# EAGLE board pdb (EAGLE 9.1.3)
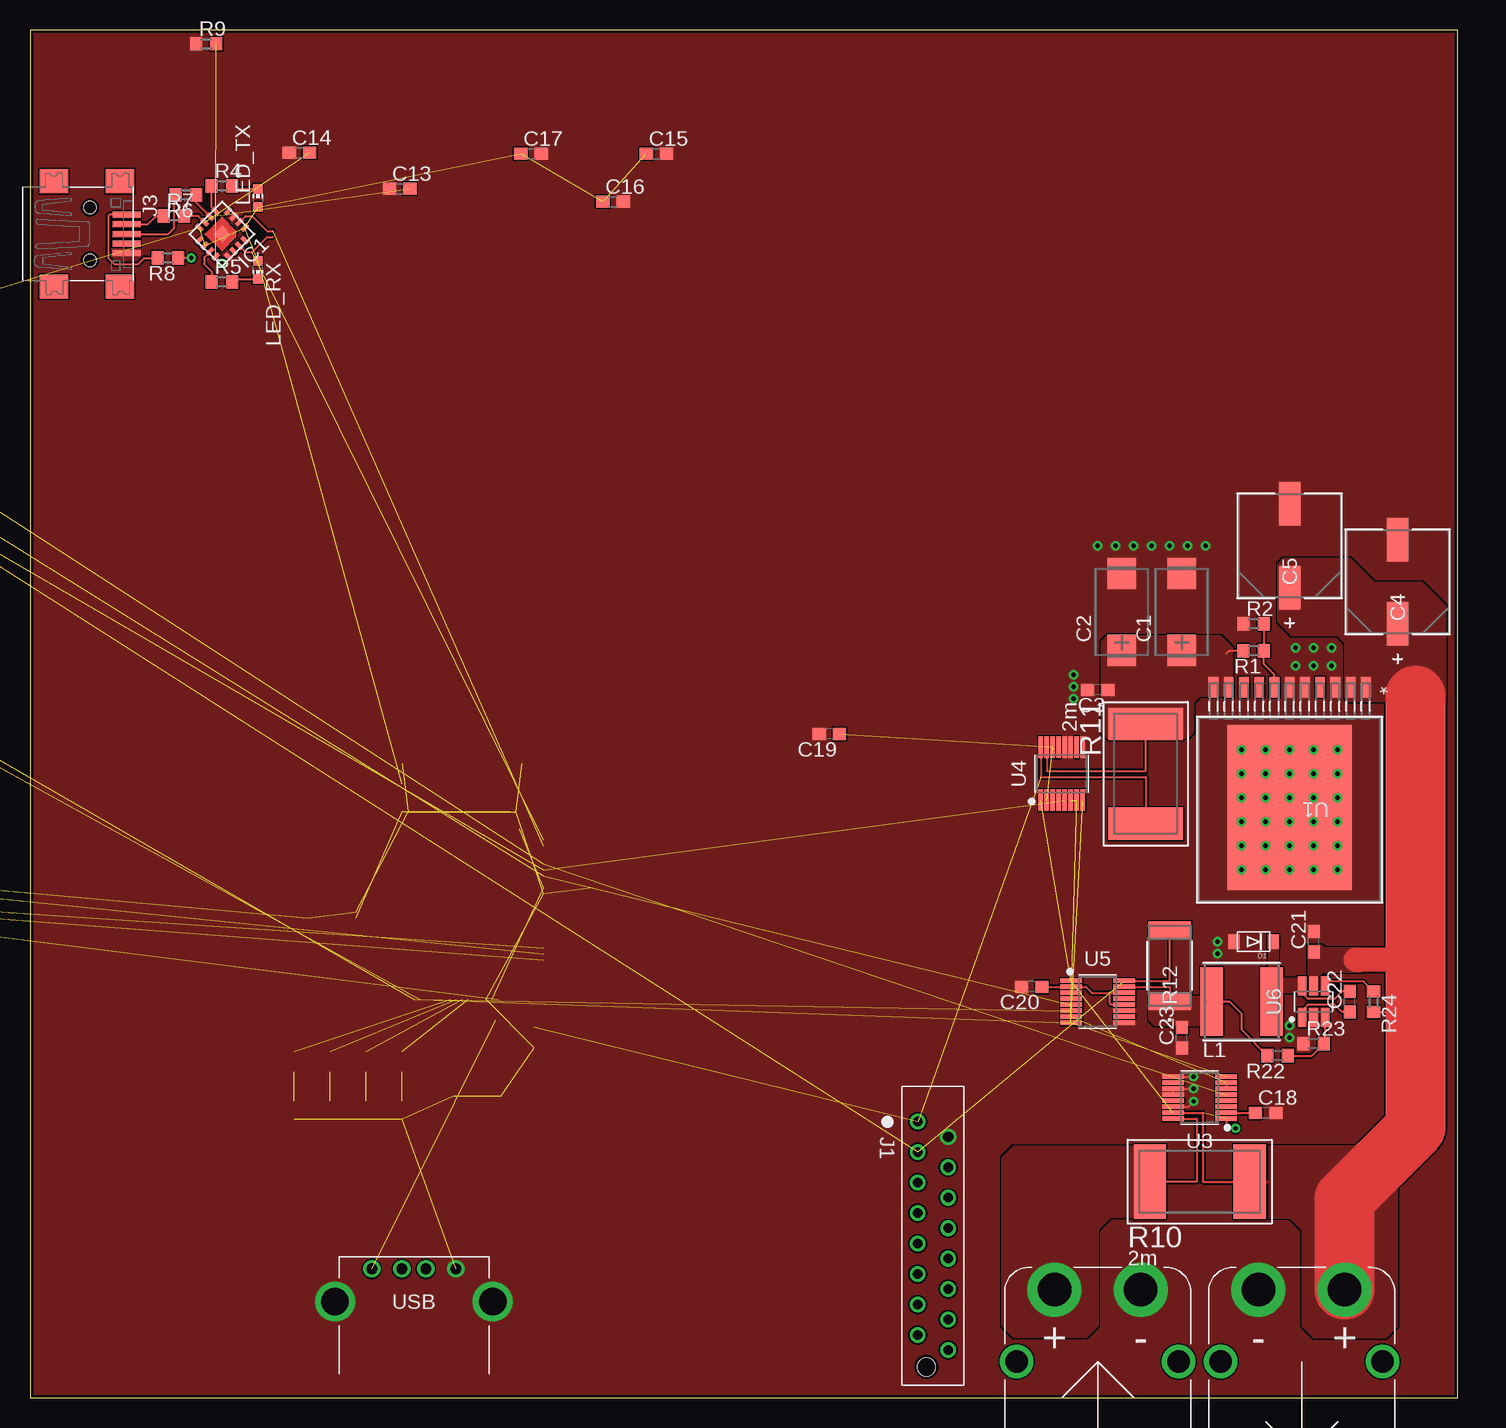
[diagram p0: board, top side]
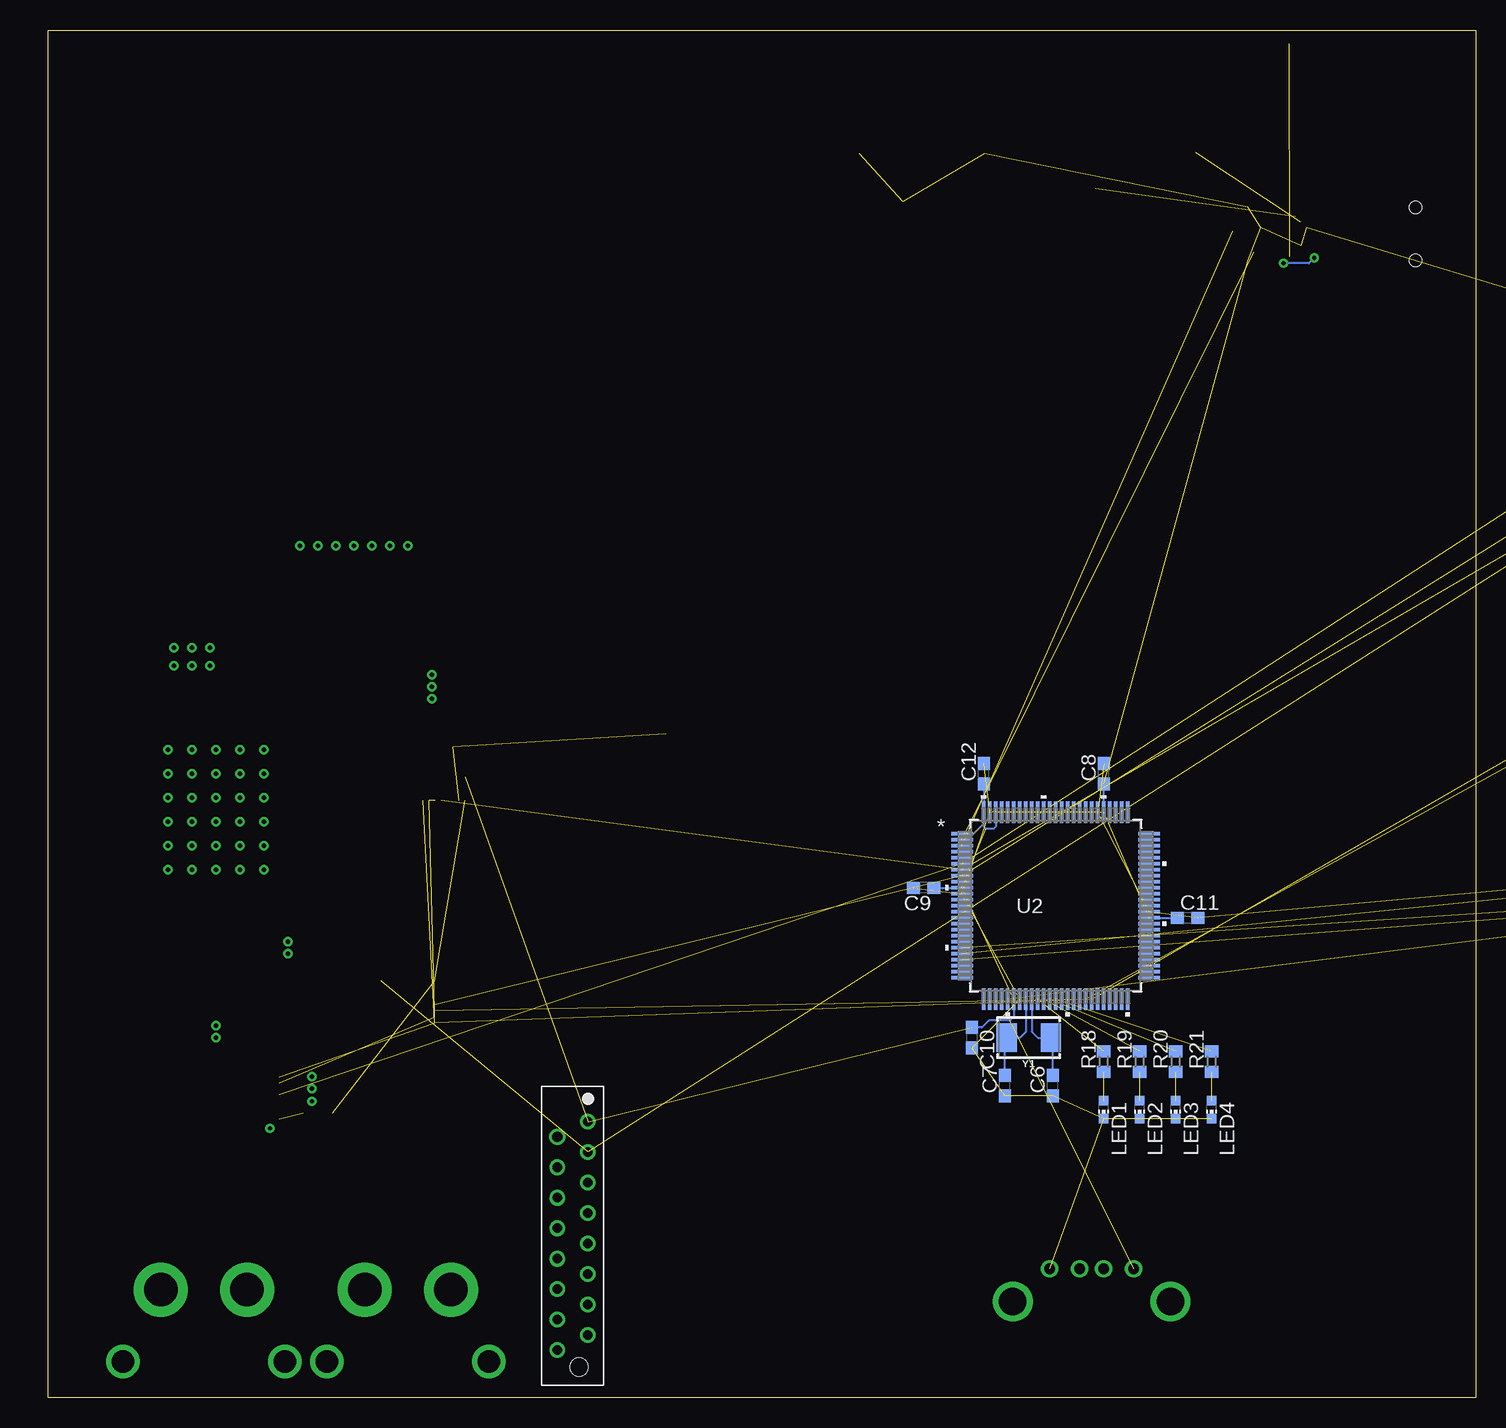
[diagram p1: board, bottom side, seen from below]

Size 119 x 114 mm. Coordinates in mm from the lower left corner, seen from the top.
Outline: 0,0 119,0 119,114 0,114 0,0
Copper layers (1*16): Top 0.035mm / dielectric 1.53mm / Bottom 0.035mm
Design rules "default *": minimum track width 6mil, minimum drill 0.35mm, track to track 6mil, track to pad 6mil, pad to pad 6mil, via to via 6mil, smd to smd 6mil, copper to edge 10mil, drill to drill 6mil, minimum pad ring 10mil, minimum via ring 8mil, stop-mask expansion 4mil, vias tented up to drill 0mil, thermal gap 10mil

## Footprints (pad centres in the part's own frame; a part is rotated, then mirrored left to right if it is on the bottom)
XT60PWMALE = drill 1.85: NC1 -6.75,0; NC2 6.75,0 | drill 2.8 pad 4.5: NEG -3.6,-6; POS 3.6,-6
CT7343 = smd 2.6 x 2.4: + -3.2,0; - 3.2,0
C0603 = smd 1.1 x 1: 1 -0.85,0; 2 0.85,0
PCAP_SVP_E7 = smd 3.607 x 1.829: 1 -3.505,0; 2 3.505,0
SOD-123FL = smd 0.91 x 1.22: A 1.637,0; C -1.637,0
XT60PWFEMALE = drill 1.85: NC1 -6.75,0; NC2 6.75,0 | drill 2.8 pad 4.5: NEG 3.6,-6; POS -3.6,-6
QFN16 = smd 0.7 x 0.35: 1 -1.725,0.975; 2 -1.725,0.325; 3 -1.725,-0.325; 4 -1.725,-0.975; 9 1.725,-0.975; 10 1.725,-0.325; 11 1.725,0.325; 12 1.725,0.975 | smd 0.35 x 0.7: 5 -0.975,-1.725; 6 -0.325,-1.725; 7 0.325,-1.725; 8 0.975,-1.725; 13 0.975,1.725; 14 0.325,1.725; 15 -0.325,1.725; 16 -0.975,1.725 | smd 1 x 1: TAB 0,0
2X03 = drill 1.016 octagon: 1 -2.54,-1.27; 2 -2.54,1.27; 3 0,-1.27; 4 0,1.27; 5 2.54,-1.27; 6 2.54,1.27
CONN_1-338068-6 = drill 0.8: 1 0,0; 3 2.54,0; 4 3.81,2.54; 5 5.08,0; 6 6.35,2.54; 7 7.62,0; 8 8.89,2.54; 9 10.16,0; 10 11.43,2.54; 11 12.7,0; 12 13.97,2.54; 13 15.24,0; 14 16.51,2.54; 15 17.78,0; 16 19.05,2.54 | drill 0.864: 2 1.27,2.54 | hole 1.5: 20.45,0.74
USB-A = drill 0.914: 1 -3.5,2.718; 2 -1,2.718; 3 1,2.718; 4 3.5,2.718 | drill 2.3: 5 -6.57,0; 6 6.57,0
USB-MINIB = smd 0.5 x 2.308: D+ 0,4.064; D- -0.8,4.064; GND 1.6,4.064; ID 0.8,4.064; VBUS -1.6,4.064 | smd 2 x 2.4: GND1 -4.4,-2; GND2 -4.4,3.5; GND3 4.4,3.5; GND4 4.4,-2 | hole 1: -2.2,1; 2.2,1
IND_TAIYO_NRS6045 = smd 1.9 x 5.7: 1 -2.5,0; 2 2.5,0
CHIP-LED0603 = smd 0.8 x 0.8: A 0,-0.75; C 0,0.75
R0603 = smd 1 x 1.1: 1 -0.85,0; 2 0.85,0
3920 = smd 2.7 x 6.2: P$1 -4.15,0; P$2 4.15,0
BO_CRA2512 = smd 1.397 x 3.531: 1 -2.985,0; 2 2.985,0
TZA11A-M = smd 0.813 x 1.727: 1 -6.35,-10.211; 2 -5.08,-10.211; 3 -3.81,-10.211; 4 -2.54,-10.211; 5 -1.27,-10.211; 6 0,-10.211; 7 1.27,-10.211; 8 2.54,-10.211; 9 3.81,-10.211; 10 5.08,-10.211; 11 6.35,-10.211 | smd 10.389 x 13.767: 12 0,-0.178
100A-M = smd 1.778 x 0.279: 1 -7.798,6; 2 -7.798,5.5; 3 -7.798,5; 4 -7.798,4.5; 5 -7.798,4; 6 -7.798,3.5; 7 -7.798,3; 8 -7.798,2.5; 9 -7.798,2; 10 -7.798,1.5; 11 -7.798,1; 12 -7.798,0.5; 13 -7.798,0; 14 -7.798,-0.5; 15 -7.798,-1; 16 -7.798,-1.5; 17 -7.798,-2; 18 -7.798,-2.5; 19 -7.798,-3; 20 -7.798,-3.5; 21 -7.798,-4; 22 -7.798,-4.5; 23 -7.798,-5; 24 -7.798,-5.5; 25 -7.798,-6; 51 7.798,-6; 52 7.798,-5.5; 53 7.798,-5; 54 7.798,-4.5; 55 7.798,-4; 56 7.798,-3.5; 57 7.798,-3; 58 7.798,-2.5; 59 7.798,-2; 60 7.798,-1.5; 61 7.798,-1; 62 7.798,-0.5; 63 7.798,0; 64 7.798,0.5; 65 7.798,1; 66 7.798,1.5; 67 7.798,2; 68 7.798,2.5; 69 7.798,3; 70 7.798,3.5; 71 7.798,4; 72 7.798,4.5; 73 7.798,5; 74 7.798,5.5; 75 7.798,6 | smd 0.279 x 1.778: 26 -6,-7.798; 27 -5.5,-7.798; 28 -5,-7.798; 29 -4.5,-7.798; 30 -4,-7.798; 31 -3.5,-7.798; 32 -3,-7.798; 33 -2.5,-7.798; 34 -2,-7.798; 35 -1.5,-7.798; 36 -1,-7.798; 37 -0.5,-7.798; 38 0,-7.798; 39 0.5,-7.798; 40 1,-7.798; 41 1.5,-7.798; 42 2,-7.798; 43 2.5,-7.798; 44 3,-7.798; 45 3.5,-7.798; 46 4,-7.798; 47 4.5,-7.798; 48 5,-7.798; 49 5.5,-7.798; 50 6,-7.798; 76 6,7.798; 77 5.5,7.798; 78 5,7.798; 79 4.5,7.798; 80 4,7.798; 81 3.5,7.798; 82 3,7.798; 83 2.5,7.798; 84 2,7.798; 85 1.5,7.798; 86 1,7.798; 87 0.5,7.798; 88 0,7.798; 89 -0.5,7.798; 90 -1,7.798; 91 -1.5,7.798; 92 -2,7.798; 93 -2.5,7.798; 94 -3,7.798; 95 -3.5,7.798; 96 -4,7.798; 97 -4.5,7.798; 98 -5,7.798; 99 -5.5,7.798; 100 -6,7.798
SOP50P489X110-16 = smd 1.753 x 0.344: 1 -2.209,1.75; 2 -2.209,1.25; 3 -2.209,0.75; 4 -2.209,0.25; 5 -2.209,-0.25; 6 -2.209,-0.75; 7 -2.209,-1.25; 8 -2.209,-1.75; 9 2.209,-1.75; 10 2.209,-1.25; 11 2.209,-0.75; 12 2.209,-0.25; 13 2.209,0.25; 14 2.209,0.75; 15 2.209,1.25; 16 2.209,1.75
SOT95P280X125-6 = smd 1.616 x 0.689: 1 -1.31,0.95; 2 -1.31,0; 3 -1.31,-0.95; 4 1.31,-0.95; 5 1.31,0; 6 1.31,0.95
CRYSTAL-SMD-5X3.2-2PAD = smd 1.7 x 2.4: P$1 1.85,0; P$2 -1.85,0

## Placement (x,y rotation side)
BAT  XT60PWMALE  [XT60PWMALE]  89,3 180 top
C1  330µF  [CT7343]  96,65.5 90 top
C2  330µF  [CT7343]  91,65.5 90 top
C3  47µF  [C0603]  89,59 180 top
C4  50SVPF18M  [PCAP_SVP_E7]  114,68 90 top
C5  50SVPF18M  [PCAP_SVP_E7]  105,71 90 top
C6  8pF  [C0603]  35.25,26 90 bottom
C7  8pF  [C0603]  39.25,26 90 bottom
C8  100nF  [C0603]  31,52 90 bottom
C9  100nF  [C0603]  46,42.5 180 bottom
C10  100nF  [C0603]  42,30 270 bottom
C11  100nF  [C0603]  24,40 0 bottom
C12  100nF  [C0603]  41,52 90 bottom
C13  47pF  [C0603]  30.82,100.77 0 top
C14  47pF  [C0603]  22.47,103.77 0 top
C15  100nF  [C0603]  52.22,103.69 0 top
C16  100nF  [C0603]  48.6,99.69 0 top
C17  4.7µF  [C0603]  41.77,103.69 0 top
C18  100nF  [C0603]  103,23.75 0 top
C19  100nF  [C0603]  66.64,55.31 180 top
C20  100nF  [C0603]  83.5,34.25 180 top
C21  4.7µF  [C0603]  107,38 90 top
C22  100nF  [C0603]  110,33 90 top
C23  10µF  [C0603]  96,30 90 top
D1  [SOD-123FL]  102,38 180 top
ESC  XT60PWFEMALE  [XT60PWFEMALE]  106,3 180 top
IC1  FT230XQ  [QFN16]  16,97 225 top
ISP  [2X03]  -43.18,44.45 0 top  (outside the outline)
J1  1-338068-6  [CONN_1-338068-6]  74,23 270 top
J2  USB-A  [USB-A]  32,8 0 top
J3  [USB-MINIB]  4,97 270 top
L1  22µH  [IND_TAIYO_NRS6045]  101,33 0 top
LED1  [CHIP-LED0603]  31,24 180 bottom
LED2  [CHIP-LED0603]  28,24 180 bottom
LED3  [CHIP-LED0603]  25,24 180 bottom
LED4  [CHIP-LED0603]  22,24 180 bottom
LED_RX  [CHIP-LED0603]  19,94 180 top
LED_TX  [CHIP-LED0603]  19,100 0 top
R1  9.53k  [R0603]  102,62.25 180 top
R2  1.8k  [R0603]  102,64.5 0 top
R3  10k  [R0603]  -35.15,82.85 0 top  (outside the outline)
R4  5.6  [R0603]  16,101 0 top
R5  5.6  [R0603]  16,93 0 top
R6  27  [R0603]  13,100.25 180 top
R7  27  [R0603]  12,98.5 0 top
R8  4k7  [R0603]  11.5,95 180 top
R9  10k  [R0603]  14.69,112.85 0 top
R10  2m  [3920]  97.5,18 0 top
R11  2m  [3920]  93,52 270 top
R12  40m  [BO_CRA2512]  95,36 90 top
R13  10k  [R0603]  -54.69,81.77 0 top  (outside the outline)
R14  10k  [R0603]  -54.77,83.77 0 top  (outside the outline)
R15  10k  [R0603]  -39,98 0 top  (outside the outline)
R16  10k  [R0603]  -39,92 0 top  (outside the outline)
R17  10k  [R0603]  -39,95 0 top  (outside the outline)
R18  5.6  [R0603]  31,28 90 bottom
R19  5.6  [R0603]  28,28 90 bottom
R20  5.6  [R0603]  25,28 90 bottom
R21  5.6  [R0603]  22,28 90 bottom
R22  49.9k  [R0603]  104,28.5 180 top
R23  15.8k  [R0603]  107,29.5 0 top
R24  10k  [R0603]  112,33 270 top
U1  LMZ13608TZ/NOPBTZA11A-M  [TZA11A-M]  105,49 180 top
U2  ATMEGA2560-16AU100A-M  [100A-M]  35,41 0 bottom
U3  LTC2946CMSPBF  [SOP50P489X110-16]  97.5,25 180 top
U4  LTC2946CMSPBF  [SOP50P489X110-16]  86,52 90 top
U5  LTC2946CMSPBF  [SOP50P489X110-16]  89,33 0 top
U6  AOZ1282CI  [SOT95P280X125-6]  107,33 90 top
Y1  16MHz  [CRYSTAL-SMD-5X3.2-2PAD]  37.25,30 180 bottom

## Library data of the parts
BAT ESC = amass
C1-C3 C6-C23 = rcl; SPICEPREFIX: C
C4 C5 = 50SVPF18M; MANUFACTURER_PART_NUMBER: 50SVPF18M; VENDOR: Panasonic
D1 = adafruit; DIGIKEYNR: NRVTS245ESFT1G
IC1 = ftdichip
ISP = pinhead
J1 = TE-MicroMatch; MANUFACTURER_PART_NUMBER: 13380686; VENDOR: TE Connectivity
J2 = USB; DIGI-KEY-PN: 380-1412-ND; MPN: SS-52100-001
J3 = adafruit
L1 = inductor; MANUFACTURER_PART_NUMBER: NRS6045T220MMGK; VENDOR: TAIYO YUDEN
LED1-LED4 LED_RX LED_TX = led
R1-R9 R13-R24 = rcl; SPICEPREFIX: R
R10 = shunt_resistor; SPICEPREFIX: R
R11 = shunt_resistor
R12 = shunt_resistor; MANUFACTURER_PART_NUMBER: CRA2512FZR040ELF; VENDOR: Bourns Electronics
U1 = LMZ13608TZ; MANUFACTURER_PART_NUMBER: LMZ13608TZNOPB; VENDOR: Texas Instruments
U2 = ATMEGA2560; MANUFACTURER_PART_NUMBER: ATMEGA256016AU; VENDOR: Atmel
U3-U5 = LTC2946
U6 = AOZ1282CI
Y1 = SparkFun-Clocks

## Nets
!ALERT_+3V3: R17.1 U2.8 U5.5
!ALERT_+5V: R16.1 U2.7 U4.5
!ALERT_VBAT: R15.1 U2.6 U3.5
!RESET: ISP.5 R3.1 U2.30
+3V3: J1.3 R12.2 R13.2 R14.2 R15.2 R16.2 R17.2 U5.16
+3V3_SENSE+: C23.2 L1.1 R12.1 R22.2 U5.15
+5V: C8.1 C9.1 C10.1 C11.1 C12.1 C15.1 C16.1 C17.1 IC1.1 IC1.8 IC1.10 ISP.2 J1.1 J2.1 LED_RX.A LED_TX.A R3.2 R11.P$2 U2.10 U2.31 U2.61 U2.80 U2.98 U2.100 U4.16
+5V_SENSE+: C1.+ C2.+ C3.1 R1.2 R11.P$1 U1.10 U1.11 U4.15
BAT_SENSE+: BAT.POS R10.P$1 U3.16
FC_!RST: J1.16
FC_CS: J1.8
FC_MISO: J1.4
FC_MOSI: J1.6
FC_SCK: J1.11
FC_SCL: J1.13
FC_SDA: J1.15
GND: BAT.NEG C1.- C2.- C3.2 C4.2 C5.2 C6.1 C7.1 C8.2 C9.2 C10.2 C11.2 C12.2 C13.1 C14.1 C15.2 C16.2 C17.2 C18.2 C19.2 C20.2 C21.2 C23.1 D1.A ESC.NEG IC1.3 IC1.13 ISP.6 J1.2 J2.4 J2.5 J2.6 J3.GND LED1.C LED2.C LED3.C LED4.C R2.1 R9.1 R23.1 U1.3 U1.5 U1.6 U1.12 U2.11 U2.32 U2.62 U2.81 U2.99 U3.9 U3.11 U3.12 U3.14 U4.9 U4.11 U4.12 U5.9 U5.11 U6.2
MISO: ISP.1 U2.22
MOSI: ISP.4 U2.21
N$1: R1.1 R2.2 U1.7
N$2: C6.2 U2.34 Y1.P$2
N$3: C7.2 U2.33 Y1.P$1
N$4: C13.2 IC1.6 R6.1
N$5: C14.2 IC1.7 R7.2
N$6: IC1.5 R4.1
N$7: IC1.11 R5.1
N$8: LED_TX.C R4.2
N$9: LED_RX.C R5.2
N$10: J3.D+ R6.2
N$11: J3.D- R7.1
N$12: C18.1 U3.2
N$13: C19.1 U4.2 U4.14
N$14: R21.2 U2.38
N$15: C20.1 U5.2 U5.12 U5.14
N$16: J3.VBUS R8.2
N$17: R20.2 U2.37
N$18: R19.2 U2.36
N$19: R18.2 U2.35
N$20: LED1.A R18.1
N$21: LED2.A R19.1
N$22: LED3.A R20.1
N$23: LED4.A R21.1
N$24: R22.1 R23.2 U6.3
N$27: C22.2 D1.C L1.2 U6.6
N$28: C22.1 U6.1
N$30: R24.1 U6.4
SCK: ISP.3 U2.20
SCL: R13.1 U2.43 U3.8 U4.8 U5.8
SDA: R14.1 U2.44 U3.6 U3.7 U4.6 U4.7 U5.6 U5.7
USB_RX: IC1.15 U2.2
USB_TX: IC1.2 U2.3
VBAT: C4.1 C5.1 C21.1 ESC.POS R10.P$2 R24.2 U1.1 U1.2 U3.1 U3.15 U4.1 U5.1 U6.5
VBUS_SENSE: IC1.12 R8.1 R9.2

## Tracks (layer width: path | path; a pad name or v marks a point on that pad's centre or on a via)
!ALERT_+3V3  (2 unrouted)
!ALERT_+5V  (2 unrouted)
!ALERT_VBAT  (2 unrouted)
!RESET  (2 unrouted)
+3V3  (6 unrouted)
  Top 0.178: U5.16 95,34.75 R12.2
+3V3_SENSE+
  Top 0.152: R22.2 101,30.65 101,32 100,33 L1.1
  Top 0.178: U5.15 95,34.25 R12.1
  pour Top (no thermals): 93.25,33.5 99,33.5 99,31 93.75,31 93.25,31.5
+5V  (17 unrouted)
  Top 0.178: U4.16 84.25,51.75 93,51.75 R11.P$2
  Bottom 0.178: C9.1 U2.10 | C12.1 U2.100 41,47.6 40.8,47.4 40.2,47.4 40,47.6 U2.98 | U2.80 C8.1 | U2.61 C11.1 | U2.31 38.5,31.75 38.81,31.44 40.56,31.44 41.15,30.85 C10.1
+5V_SENSE+
  Top 0.178: U4.15 84.75,52.25 85,52.25 | 85,52.25 85.5,52.25 | 85,52.25 93,52.25 R11.P$1 | R1.2 99.95,62.25 99.7,62
  pour Top (no thermals): 100.25,58.5 100.25,62.5 99.25,63.5 89.75,63.5 89.25,63 89.25,55.5 89.75,55 95,55 96.5,55 97,55.5 97,58 97.5,58.5
BAT_SENSE+
  Top 0.178: U3.16 97.25,23.25 97.25,18 R10.P$1
  pour Top (no thermals): 81,9 81,20 82,21 94,21 94,15 90,15 89,14 89,7 89,6 88,5 82,5 81,6
GND  (via drill 0.35)  (17 unrouted)
  Top 0.178: U3.9 v97,26.75 | U3.12 U3.11 v97,25.75 | U3.14 96.55,24.25 v97,24.7
  other vias: 105,30 105,31 99,37 99,38 98,71 96.5,71 95,71 93.5,71 92,71 90.5,71 89,71 87,60.25 87,59.25 87,58.25 109,44 101,44 105,44 107,44 103,44 101,46 103,46 105,46 107,46 109,46 109,48 109,50 107,48 107,50 105,48 103,48 101,48 101,50 103,50 105,50 109,52 109,54 107,54 107,52 105,52 103,52 101,52 101,54 103,54 105,54 108.5,61 107,61 105.5,61 108.5,62.5 107,62.5 105.5,62.5
  pour Top (no thermals): 97.25,67.5 98.5,67.5 99,68 99,68.5 99,71.5 98.5,72 88.5,72 88,71.5 88,68 88.5,67.5
  pour Top (rank 6, no thermals): -10,168 259,168 261,166 261,-25 239,-47 -3,-47 -27,-23 -27,151
MISO  (1 unrouted)
MOSI  (1 unrouted)
N$1
  Top 0.152: R2.2 R1.1 102.85,61.15 103.73,60.27 U1.7
N$2
  Bottom 0.178: U2.34 37,30.5 36.5,30 Y1.P$2 35.25,29.85 C6.2
N$3
  Bottom 0.178: U2.33 37.5,30.5 38,30 Y1.P$1 39.25,29.85 C7.2
N$4  (1 unrouted)
  Top 0.178: IC1.6 13.85,99.61 R6.1
N$5  (1 unrouted)
  Top 0.178: IC1.7 14.04,98.5 R7.2
N$6
  Top 0.178: IC1.5 15.15,99.23 R4.1
N$7
  Top 0.178: IC1.11 14.5,95.04 14.5,94.5 15.15,93.85 R5.1
N$8
  Top 0.178: LED_TX.C 17.1,100.75 R4.2
N$9
  Top 0.178: R5.2 17.1,93.25 LED_RX.C
N$10
  Top 0.178: J3.D+ 11.5,97 12,97.5 12,100.1 R6.2
N$11
  Top 0.178: J3.D- 9.8,97.8 10.5,98.5 R7.1
N$12
  Top 0.178: U3.2 C18.1
N$13  (2 unrouted)
N$14  (1 unrouted)
N$15
  Top 0.178: C20.1 U5.2 88,34.25 88.5,33.75 90,33.75 | 90,33.75 U5.14 | U5.12 90.15,32.75 90,32.9 90,33.75
N$16
  Top 0.178: J3.VBUS 6.6,98.6 6.5,98.5 6.5,95 7,94.5 9,94.5 9.5,95 R8.2
N$17  (1 unrouted)
N$18  (1 unrouted)
N$19  (1 unrouted)
N$20  (1 unrouted)
N$21  (1 unrouted)
N$22  (1 unrouted)
N$23  (1 unrouted)
N$24
  Top 0.178: U6.3 107.95,29.6 R23.2 106.85,28.5 R22.1
N$27
  Top 0.178: C22.2 109.35,33.85 108.75,33.25 106.5,33.25 106.05,33.7 U6.6
  pour Top (no thermals): 104,38 104,35.5 103.25,35.5 103.25,38
  pour Top (no thermals): 106.25,33.75 104.25,33.75 104,33.5 104,32.75 102.75,32.75 102.75,35 106.25,35
N$28
  Top 0.178: C22.1 109.35,32.15 108.75,32.75 106.5,32.75 106,32.25 106,31.74 U6.1
N$30
  Top 0.152: R24.1 111.15,34.7 107.95,34.7 U6.4
SCK  (1 unrouted)
SCL  (4 unrouted)
SDA  (6 unrouted)
  Top 0.178: U3.7 U3.6
USB_RX  (1 unrouted)
  Top 0.178: IC1.15 17.96,95.5 18.5,95.5 19.75,96.75 20.25,96.75
USB_TX  (1 unrouted)
  Top 0.178: 17.49,97.99 IC1.2 17.96,98.5 18.5,98.5 19.75,97.25 20.25,97.25
VBAT  (via drill 0.35)  (3 unrouted)
  Top 0.178: U3.15 97.75,23.75 97.75,18 R10.P$2 | U3.1 99.71,22.74 100,22.45 v100.5,22.45 | R24.2 114.85,32.15 115,32 115.5,32
  Top 2: 115.5,37 115.5,36.5 110.5,36.5
  Top 5: ESC.POS 109.6,16.6 115.5,22.5 115.5,32 115.5,37 115.5,58.5
  pour Top: 101,15 105,15 106,14 106,6 107,5 113,5 114,6 114,21 101,21
  pour Top (no thermals): 109.6,58.4 109.6,62.9 109,63.5 105.2,63.5 104,64.7 104,65.6 104,69.5 104.5,70 110,70 112,68 116,68 118,66 118,58 109.9,58 109.6,58.3
  pour Top (no thermals): 106.5,37.7 106.5,35.3 106.6,35.2 106.6,33.5 107.4,33.5 107.4,35.1 107.8,35.5 111,35.5 111,37.5 107.9,37.5 107.7,37.7
VBUS_SENSE  (via drill 0.35)  (1 unrouted)
  Top 0.178: IC1.12 v16,94.56 | v16,94.56 | v13.45,95 v13.44,95 R8.1
  Bottom 0.178: v13.45,95 13.89,94.56 v16,94.56